# EAGLE board pcm2707_v1 (EAGLE 6.4)
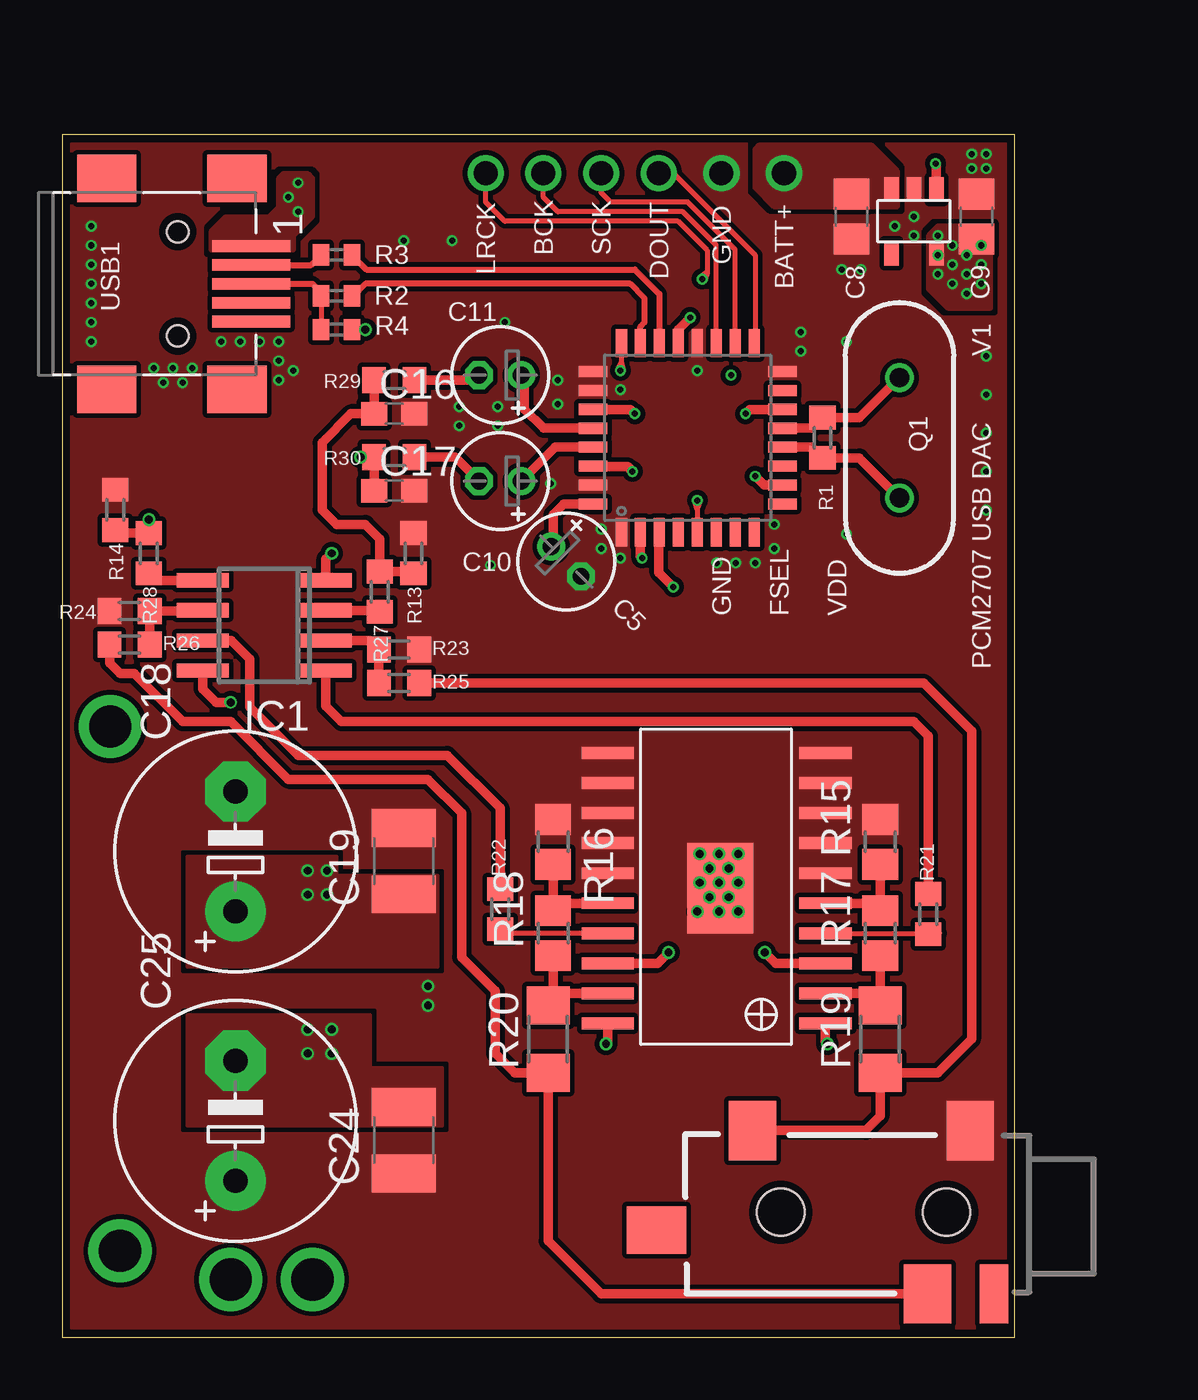
[diagram p0: board, top side]
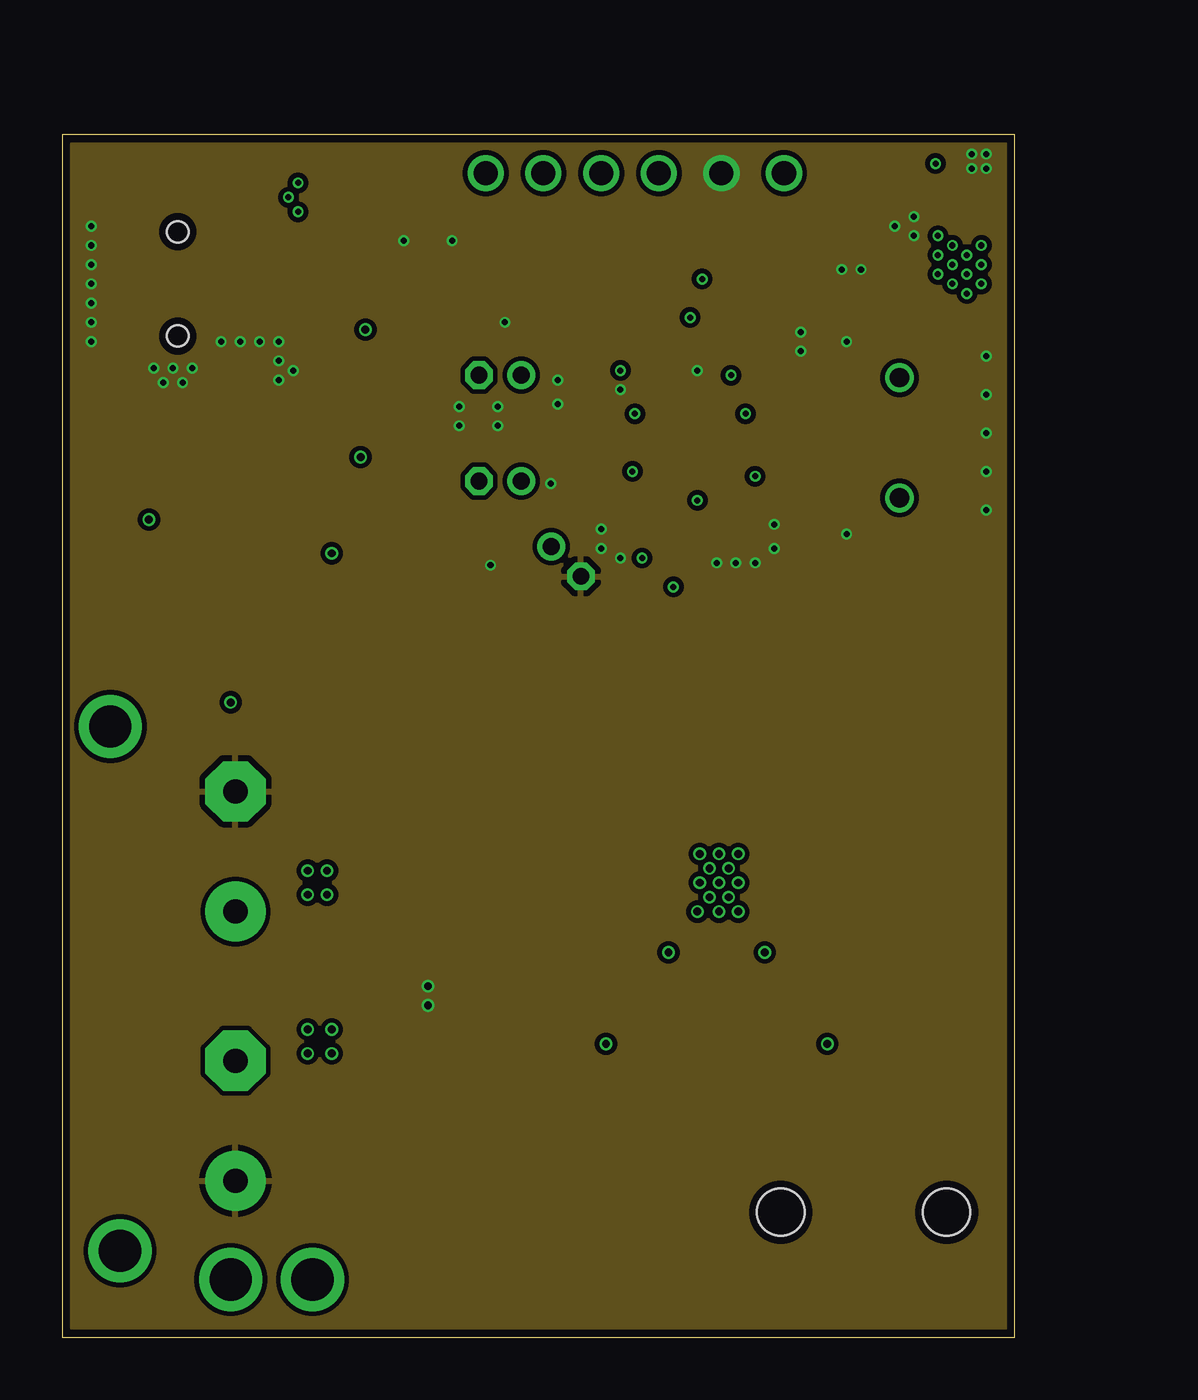
[diagram p1: board, inner layer Route2]
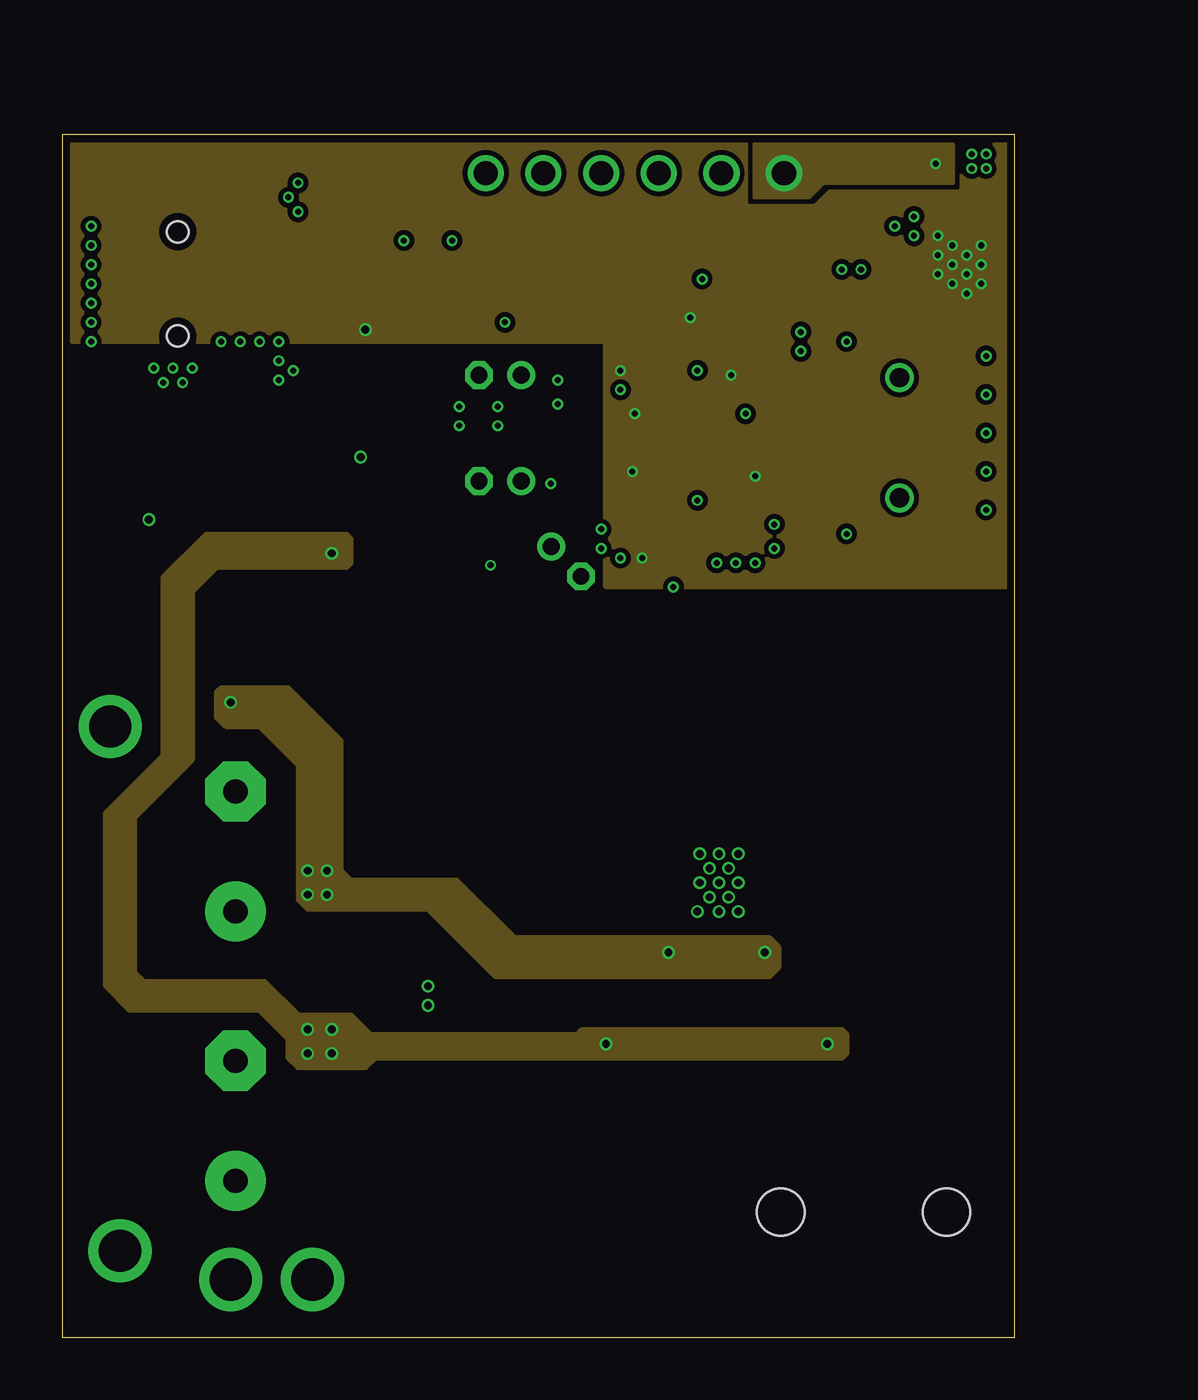
[diagram p2: board, inner layer Route3]
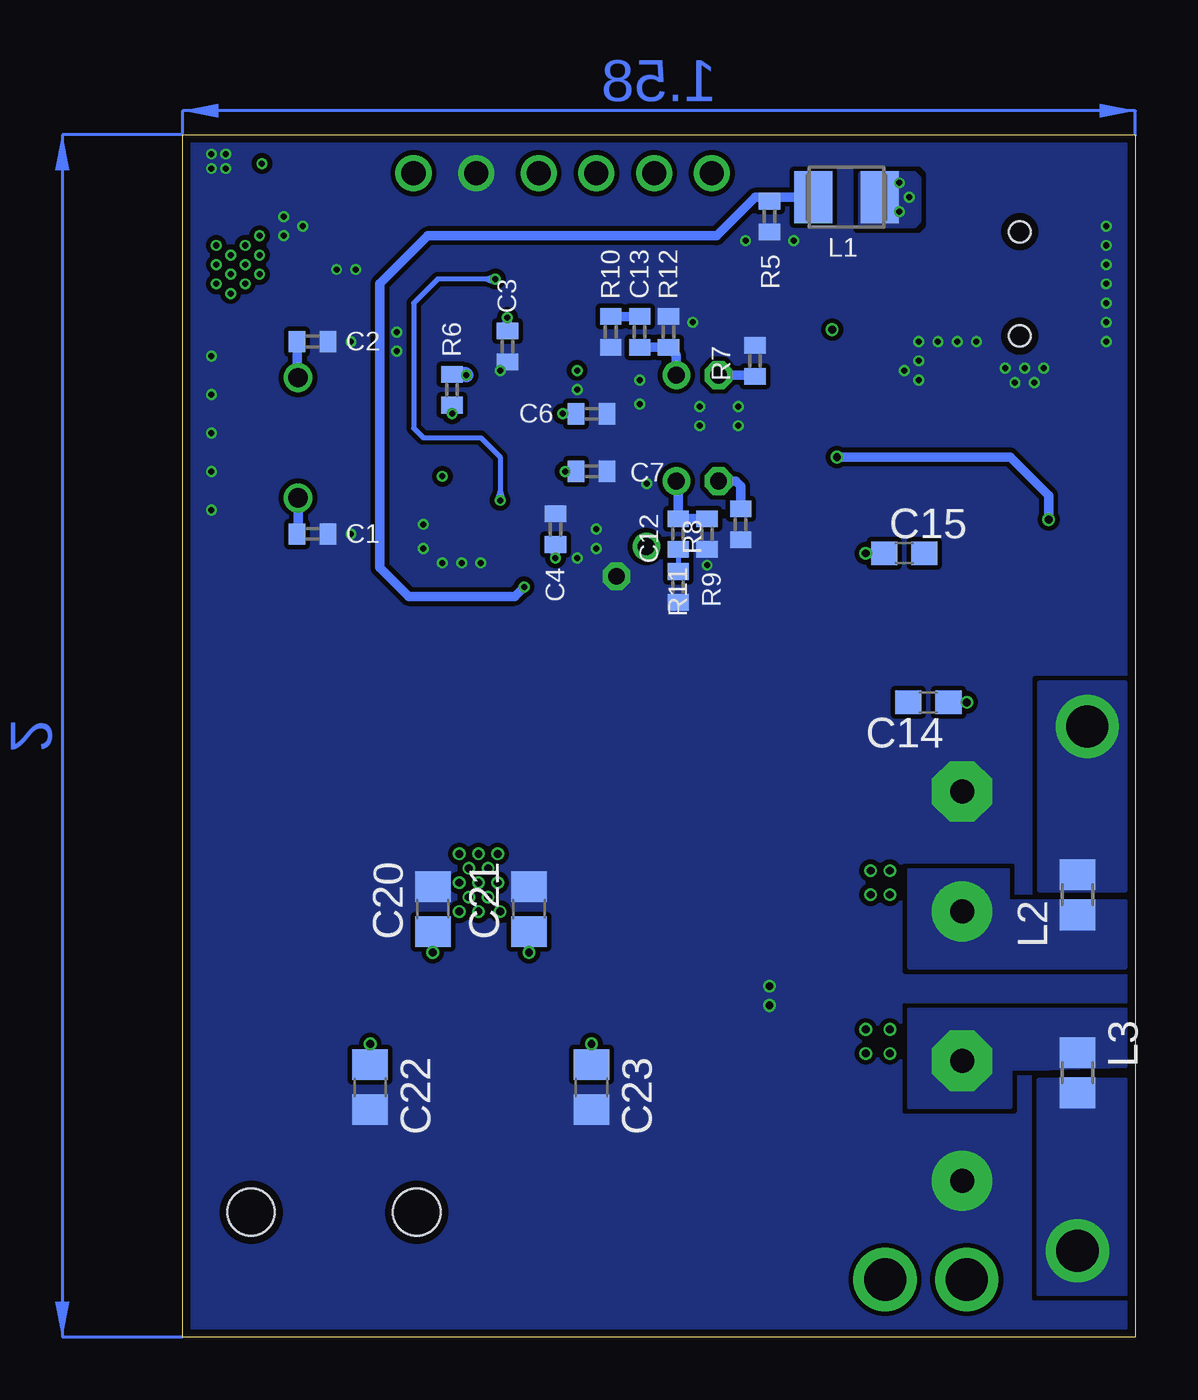
[diagram p3: board, bottom side, seen from below]

Size 40.23 x 50.8 mm. Coordinates in mm from the lower left corner, seen from the top.
Outline: 0,0 40.23,0 40.23,50.8 0,50.8 0,0
Copper layers (1*2*3*16): Top 0.035mm / dielectric 1.5mm / Route2 0.035mm / dielectric 0.15mm / Route3 0.035mm / dielectric 0.2mm / Bottom 0.035mm
Design rules "default *": minimum track width 5mil, minimum drill 10mil, track to track 8mil, track to pad 8mil, pad to pad 8mil, via to via 8mil, smd to smd 8mil, copper to edge 13mil, drill to drill 8mil, minimum pad ring 4mil, minimum via ring 4mil, stop-mask expansion 4mil, vias tented up to drill 14mil, thermal gap 10mil

## Footprints (pad centres in the part's own frame; a part is rotated, then mirrored left to right if it is on the bottom)
C0402 = smd 0.7 x 0.9: 1 -0.65,0; 2 0.65,0
E1,8-4 = drill 0.711 pad 1.168: + -0.889,0 | drill 0.711 pad 1.168 octagon: - 0.889,0
C0805 = smd 1.3 x 1.5: 1 -0.95,0; 2 0.95,0
C0603 = smd 1.1 x 1: 1 -0.85,0; 2 0.85,0
E5-10,5 = drill 1.016 pad 2.54: + -2.54,0 | drill 1.016 pad 2.54 octagon: - 2.54,0
C1210 = smd 1.6 x 2.7: 1 -1.4,0; 2 1.4,0
SO8 = smd 0.6 x 2.2: 1 -1.905,-2.6; 2 -0.635,-2.6; 3 0.635,-2.6; 4 1.905,-2.6; 5 1.905,2.6; 6 0.635,2.6; 7 -0.635,2.6; 8 -1.905,2.6
AUDIO-JACK-3.5MM-SMD = smd 2 x 2.5: RING 4.3,3.45; SLEEVE 2.5,-3.45; TIP 11.7,-3.45 | smd 1.2 x 2.5: RSH 1.5,3.45 | smd 2.5 x 2: TSH 15.75,0.75 | hole 2: 3.5,0; 10.5,0
L3225M = smd 1.6 x 2.2: 1 -1.4,0; 2 1.4,0
FB805 = smd 1.3 x 1.5: 1 -0.85,0; 2 0.85,0
SOT-23 = smd 0.6 x 1.05: 1 -0.95,-1.35; 2 0,-1.35; 3 0.95,-1.35; 4 0.95,1.35; 5 -0.95,1.35
HC49US = drill 0.813: 1 -2.54,0; 2 2.54,0
R0603 = smd 1 x 1.1: 1 -0.85,0; 2 0.85,0
R0402 = smd 0.7 x 0.9: 1 -0.65,0; 2 0.65,0
R0805 = smd 1.3 x 1.5: 1 -0.95,0; 2 0.95,0
R1206 = smd 1.6 x 1.803: 1 -1.422,0; 2 1.422,0
PCM2707 = smd 0.47 x 1.2: 1 -2.8,-4; 2 -2,-4; 3 -1.2,-4; 4 -0.4,-4; 5 0.4,-4; 6 1.2,-4; 7 2,-4; 8 2.8,-4; 17 2.8,4; 18 2,4; 19 1.2,4; 20 0.4,4; 21 -0.4,4; 22 -1.2,4; 23 -2,4; 24 -2.8,4 | smd 1.2 x 0.47: 9 4,-2.8; 10 4,-2; 11 4,-1.2; 12 4,-0.4; 13 4,0.4; 14 4,1.2; 15 4,2; 16 4,2.8; 25 -4,2.8; 26 -4,2; 27 -4,1.2; 28 -4,0.4; 29 -4,-0.4; 30 -4,-1.2; 31 -4,-2; 32 -4,-2.8
TPA6120_TPA6120 = smd 0.5 x 2.2: 1 0.25,1.095; 2 1.52,1.095; 3 2.79,1.095; 4 4.06,1.095; 5 5.33,1.095; 6 6.6,1.095; 7 7.87,1.095; 8 9.14,1.095; 9 10.41,1.095; 10 11.68,1.095; 11 11.68,10.295; 12 10.41,10.295; 13 9.14,10.295; 14 7.87,10.295; 15 6.6,10.295; 16 5.33,10.295; 17 4.06,10.295; 18 2.79,10.295; 19 1.52,10.295; 20 0.25,10.295 | smd 3.81 x 2.79: 21 5.965,5.54
CONN_USB_MINI-B = smd 2 x 2.5: BODY@1 -4.45,2.5; BODY@2 4.45,2.5; BODY@3 4.45,-3; BODY@4 -4.45,-3 | smd 0.5 x 3.3: D+ 0,3.1; D- -0.8,3.1; GND 1.6,3.1; ID 0.8,3.1; VUSB -1.6,3.1 | hole 0.9: -2.2,0; 2.2,0

## Placement (x,y rotation side)
C1  [C0402]  34.75,33.93 180 bottom
C2  [C0402]  34.75,42.06 180 bottom
C3  100n  [C0402]  26.52,41.86 270 bottom
C4  100n  [C0402]  24.49,34.14 90 bottom
C5  [E1,8-4]  21.28,32.77 315 top
C6  100n  [C0402]  22.96,39.01 0 bottom
C7  100n  [C0402]  22.96,36.58 0 bottom
C8  1u  [C0805]  33.32,47.35 270 top
C9  1u  [C0805]  38.61,47.35 90 top
C10  100u  [E1,8-4]  18.49,36.17 180 top
C11  100u  [E1,8-4]  18.49,40.64 180 top
C12  100n  [C0402]  19.3,33.93 270 bottom
C13  100n  [C0402]  20.93,42.47 90 bottom
C14  [C0603]  8.74,26.82 180 bottom
C15  100n  [C0603]  9.75,33.12 0 bottom
C16  100p  [C0603]  14.02,39.01 0 top
C17  100p  [C0603]  14.02,35.76 0 top
C18  100u  [E5-10,5]  7.32,20.52 90 top
C19  10u  [C1210]  14.43,20.12 90 top
C20  100n  [C0805]  29.67,18.08 90 bottom
C21  100n  [C0805]  25.6,18.08 90 bottom
C22  100n  [C0805]  32.31,10.57 270 bottom
C23  100n  [C0805]  22.96,10.57 270 bottom
C24  10u  [C1210]  14.43,8.33 90 top
C25  100u  [E5-10,5]  7.32,9.14 90 top
IC1  AD8620R  [SO8]  8.53,30.07 90 top
J2  AUDIO-JACK2SMD  [AUDIO-JACK-3.5MM-SMD]  40.84,5.28 180 top
L1  [L3225M]  12.19,48.16 180 bottom
L2  [FB805]  2.44,18.69 90 bottom
L3  [FB805]  2.44,11.18 270 bottom
LDO1  3.3V  [SOT-23]  35.97,47.14 180 top
Q1  [HC49US]  35.36,38 90 top
R1  1M  [R0603]  32.11,38 90 top
R2  22  [R0402]  11.58,43.99 180 top
R3  22  [R0402]  11.58,45.72 180 top
R4  22  [R0402]  11.58,42.57 0 top
R5  1M  [R0402]  15.44,47.35 270 bottom
R6  1M  [R0402]  28.85,40.03 90 bottom
R7  22  [R0402]  16.05,41.25 270 bottom
R8  22  [R0402]  16.66,34.34 90 bottom
R9  22  [R0402]  19.3,31.7 90 bottom
R10  22  [R0402]  22.15,42.47 90 bottom
R11  22  [R0402]  18.08,33.93 90 bottom
R12  22  [R0402]  19.71,42.47 270 bottom
R13  22K  [R0603]  14.83,33.12 270 top
R14  22K  [R0603]  2.24,34.95 270 top
R15  1K  [R0805]  34.54,20.93 90 top
R16  1K  [R0805]  20.73,20.93 270 top
R17  1K  [R0805]  34.54,17.07 90 top
R18  1K  [R0805]  20.73,17.07 90 top
R19  10  [R1206]  34.54,12.6 90 top
R20  10  [R1206]  20.52,12.6 90 top
R21  100  [R0603]  36.58,17.88 90 top
R22  100  [R0603]  18.49,18.08 90 top
R23  1K  [R0603]  14.22,29.06 0 top
R24  1K  [R0603]  2.84,30.68 180 top
R25  2K  [R0603]  14.22,27.64 0 top
R26  2K  [R0603]  2.84,29.26 0 top
R27  100  [R0603]  13.41,31.5 270 top
R28  100  [R0603]  3.66,33.12 270 top
R29  1K  [R0603]  14.02,40.44 180 top
R30  1K  [R0603]  14.02,37.19 180 top
U$1  PCM2707  [PCM2707]  26.42,38 0 top
U$2  TPA6120_TPA6120  [TPA6120_TPA6120]  33.32,13 90 top
USB1  CON-USB-F-MINI-B  [CONN_USB_MINI-B]  4.88,44.5 270 top

## Library data of the parts
C1-C25 L1 R1-R30 = rcl
IC1 = analog-devices; MF: ALTERA CORPORATION; MPN: AD8620ARZ; OC_FARNELL: 9994386; OC_NEWARK: 59K6972
J2 = SparkFun-Connectors; PROD_ID: CONN-10353
L2 L3 USB1 = dp_devices
LDO1 = ti_ldo
Q1 = SparkFun
U$1 = pcm2704c
U$2 = amp

## Nets
AMP_OUT_L: J2.TIP R19.1 R25.2
AMP_OUT_R: J2.RING R20.1 R26.1
BCK: U$1.19
D+: R2.1 U$1.23
D-: R3.1 U$1.22
DAC_OUT_L: C11.- R7.2 R29.1
DAC_OUT_R: C10.- R8.2 R30.1
DOUT: U$1.17
FSEL: U$1.9
GND: C1.1 C2.1 C3.2 C4.2 C5.- C6.2 C7.2 C8.2 C9.2 C16.2 C17.2 C18.- C19.2 C20.2 C21.2 C22.2 C23.2 C24.1 C25.+ J2.SLEEVE LDO1.2 R5.2 R7.1 R8.1 R9.1 R10.1 R11.1 R12.1 R13.1 R14.1 R15.2 R16.1 R23.2 R24.2 U$1.1 U$1.16 U$1.20 U$1.25 U$1.26 U$1.31 U$2.6 U$2.7 U$2.8 U$2.9 U$2.10 U$2.11 U$2.12 U$2.13 U$2.14 U$2.15 U$2.21
LRCK: U$1.5
N$1: C5.+ U$1.32
N$2: C10.+ C12.1 R11.2 U$1.29
N$3: C11.+ C13.1 R12.2 U$1.28
N$4: IC1.5 R28.2
N$5: IC1.3 R27.2
N$6: C12.2 R9.2
N$7: C13.2 R10.2
N$10: R6.1 U$1.14
N$11: IC1.1 R21.2
N$12: C16.1 R13.2 R27.1 R29.2
N$13: IC1.7 R22.2
N$14: C17.1 R14.2 R28.1 R30.2
N$17: IC1.2 R23.1 R25.1
N$18: IC1.6 R24.1 R26.2
N$21: R17.1 R19.2 U$2.2
N$22: R18.1 R20.2 U$2.19
N$25: R15.1 R17.2 U$2.5
N$26: R16.2 R18.2 U$2.16
N$27: R21.1 U$2.4
N$28: R22.1 U$2.17
SCK: U$1.18
USB_DN: R3.2 USB1.D-
USB_DP: R2.2 R4.1 USB1.D+
USB_VBUS: L1.1 USB1.VUSB
V+: C14.1 C18.+ C19.1 C20.1 C21.1 IC1.8 L2.1 U$2.3 U$2.18
V+_IN: L2.2
V-: C15.1 C22.1 C23.1 C24.2 C25.- IC1.4 L3.1 U$2.1 U$2.20
V-_IN: L3.2
VBUS: L1.2 R5.1 U$1.3
VDD: C3.1 C4.1 C6.1 C7.1 C9.1 LDO1.5 R4.2 R6.2 U$1.2 U$1.10 U$1.21 U$1.24 U$1.27 U$1.30
VIN: C8.1 LDO1.1 LDO1.3
XTI: C1.2 Q1.1 R1.1 U$1.12
XTO: C2.2 Q1.2 R1.2 U$1.13

## Tracks (layer width: path | path; a pad name or v marks a point on that pad's centre or on a via)
AMP_OUT_L
  Top 0.406: J2.TIP 28.74,8.74 33.93,8.74 34.54,9.35 R19.1 36.98,11.18 38.41,12.6 38.41,25.6 36.37,27.63 R25.2
AMP_OUT_R
  Top 0.406: J2.RING 36.13,1.83 22.76,1.83 20.52,4.06 R20.1 19.1,11.18 18.29,11.99 18.29,14.63 16.87,16.05 16.87,22.15 15.44,23.57 9.55,23.57 7.11,26.01 5.08,26.01 3.05,28.04 2.44,28.04 2,28.48 R26.1
BCK  (via drill 1.02)
  Top 0.203: U$1.19 27.62,46.15 26.21,47.55 20.93,47.55 20.32,48.16 v20.32,49.17
D+
  Top 0.254: R2.1 12.29,43.99 12.8,44.5 23.98,44.5 24.59,43.89 24.59,42.87 24.42,42.7 U$1.23
D-
  Top 0.254: R3.1 12.84,45.11 24.18,45.11 25.22,44.07 U$1.22
DAC_OUT_L
  Top 0.406: R29.1 17.4,40.44 C11.-
  Bottom 0.406: C11.- 16.1,40.64 R7.2
DAC_OUT_R
  Top 0.406: R30.1 16.59,37.19 C10.-
  Bottom 0.406: R8.2 16.66,35.97 16.87,36.17 C10.-
DOUT  (via drill 1.02)
  Top 0.203: U$1.17 29.26,42.04 29.26,45.72 25.81,49.17 v25.2,49.17
GND  (via drill 0.25, 0.33, 1.02)
  other vias: 27.84,49.17 35.15,46.94 35.97,47.35 35.97,46.53 38.4,49.99 39.01,49.99 38.4,49.38 39.01,49.38 9.14,42.06 9.14,41.25 9.14,40.44 9.75,40.84 1.22,46.94 1.22,46.13 1.22,45.31 1.22,44.5 1.22,43.69 1.22,42.88 1.22,42.06 16.46,46.33 14.43,46.33 22.76,34.14 23.57,32.92 30.07,34.34 29.26,32.72 30.07,33.32 20.93,40.44 18.69,42.88 20.93,39.42 8.33,42.06 7.52,42.06 6.71,42.06 3.86,40.94 4.67,40.94 5.49,40.94 20.62,36.07 26.82,40.84 27.64,32.72 28.45,32.72 32.92,45.11 33.73,45.11 33.12,42.06 33.12,33.93 31.19,42.47 31.19,41.66 39.01,34.95 39.01,36.58 39.01,38.2 39.01,39.83 39.01,41.45 16.76,39.32 18.39,39.32 16.76,38.51 18.39,38.51 5.08,40.34 4.27,40.34 22.76,33.32 23.57,40.03 18.08,32.61 15.44,14.83 15.44,14.02
  pour Top (rank 6, no thermals): 0.41,50.39 39.83,50.39 39.83,0.41 0.41,0.41
  pour Bottom (rank 6, no thermals): 0.41,50.39 39.83,50.39 39.83,0.41 0.41,0.41
  pour Route2: 0.41,50.39 39.83,50.39 39.83,0.41 0.41,0.41
LRCK  (via drill 0.25, 1.02)
  Top 0.203: 27.23,45.03 27.23,45.92 26.01,47.14 18.69,47.14 17.88,47.95 v17.88,49.17 | 27.23,45.03 27.23,44.91 v27.03,44.7 | v26.82,35.36 26.82,34.98 | 26.82,34.98 U$1.5 | 27.23,45.03 26.95,44.8 v27.03,44.7 | 27.23,45.03 27.15,44.68 v27.03,44.7 | 26.82,34.98 26.94,35.31 v26.82,35.36 | 26.82,34.98 26.7,35.31 v26.82,35.36
  Bottom 0.203: v27.03,44.7 27.41,44.7 | 27.41,44.7 29.46,44.7 30.48,43.69 30.48,38.4 30.07,38 27.64,38 26.82,37.19 26.82,35.74 | 26.82,35.74 v26.82,35.36 | 27.41,44.7 27.07,44.82 v27.03,44.7 | 27.41,44.7 27.07,44.58 v27.03,44.7 | 26.82,35.74 26.7,35.4 v26.82,35.36 | 26.82,35.74 26.94,35.4 v26.82,35.36
N$1
  Top 0.406: U$1.32 21.18,35.2 20.73,34.75 20.73,33.48 C5.+
N$2
  Top 0.406: U$1.29 20.81,37.6 C10.+
  Bottom 0.406: R11.2 C12.1 19.3,36.09 C10.+
N$3
  Top 0.406: U$1.28 20.33,38.4 19.51,39.22 19.51,40.52 C11.+
  Bottom 0.406: C11.+ 19.38,41.49 R12.2 C13.1
N$4
  Top 0.406: IC1.5 3.95,31.98 R28.2
N$5
  Top 0.406: IC1.3 13.35,30.71 R27.2
N$6
  Bottom 0.203: C12.2 R9.2
N$7
  Bottom 0.406: C13.2 R10.2
N$10  (via drill 0.25)
  Top 0.406: U$1.14 29.04,39.2 v28.85,39.01
  Bottom 0.406: R6.1 v28.85,39.01
N$11
  Top 0.406: R21.2 36.58,25.4 35.97,26.01 11.79,26.01 11.13,26.66 IC1.1
N$12
  Top 0.406: R13.2 14.76,32.35 R27.1 13.41,33.73 12.8,34.34 11.58,34.34 10.97,34.95 10.97,37.79 12.19,39.01 C16.1 R29.2
N$13
  Top 0.406: IC1.7 7.14,29.44 7.93,28.65 7.93,26.62 9.96,24.59 16.26,24.59 18.49,22.35 R22.2
N$14  (via drill 0.33)
  Top 0.406: R14.2 2.36,33.97 R28.1 v3.66,34.54 | C17.1 R30.2 v12.6,37.19
  Bottom 0.406: v3.66,34.54 3.66,35.56 5.28,37.19 v12.6,37.19
N$15  (via drill 0.33)
  other vias: 26.92,20.42
N$16  (via drill 0.33)
  other vias: 27.74,20.42
N$17
  Top 0.406: IC1.2 12.99,29.44 R23.1 R25.1
N$18
  Top 0.406: IC1.6 5.31,30.71 5.28,30.68 R24.1 R26.2
N$20  (via drill 1.78)
  other vias: 7.11,2.44
N$21
  Top 0.406: U$2.2 34.04,14.52 R19.2 R17.1
N$22
  Top 0.406: 20.32,13.41 R20.2 | U$2.19 21.03,14.52 R20.2 | R18.1 20.73,14.22 R20.2
N$23  (via drill 1.78)
  other vias: 10.57,2.44
N$25
  Top 0.406: U$2.5 34.23,18.33 R17.2 R15.1
N$26
  Top 0.406: U$2.16 21.04,18.33 R18.2 R16.2
N$27
  Top 0.203: U$2.4 37.05,17.07 R21.1
N$28
  Top 0.203: U$2.17 18.56,17.06 R22.1
N$31  (via drill 0.33)
  other vias: 28.55,20.42
N$32  (via drill 0.33)
  other vias: 27.33,19.81
N$33  (via drill 0.33)
  other vias: 28.14,19.81
N$34  (via drill 0.33)
  other vias: 26.92,19.2
N$35  (via drill 0.33)
  other vias: 27.74,19.2
N$36  (via drill 0.33)
  other vias: 28.55,19.2
N$37  (via drill 0.33)
  other vias: 27.33,18.59
N$38  (via drill 0.33)
  other vias: 28.14,18.59
N$39  (via drill 0.33)
  other vias: 26.82,17.98
N$40  (via drill 0.33)
  other vias: 27.74,17.98
N$41  (via drill 0.33)
  other vias: 28.55,17.98
SCK  (via drill 1.02)
  Top 0.203: U$1.18 28.42,45.95 26.42,47.95 23.17,47.95 22.76,48.36 v22.76,49.17
USB_DN
  Top 0.254: R3.2 10.51,45.3 USB1.D-
USB_DP
  Top 0.203: R2.2 R4.1
  Top 0.254: USB1.D+ 10.57,44.5 10.93,44.13 R2.2
USB_VBUS  (via drill 0.25)
  other vias: 9.96,47.55 9.96,48.77 9.55,48.16
  pour Top (no thermals): 6.3,45.92 6.3,46.74 6.91,47.35 8.74,47.35 9.14,47.75 9.14,48.97 9.35,49.17 10.36,49.17 10.57,48.97 10.57,47.35 9.75,46.53 9.75,45.92
  pour Bottom (no thermals): 11.58,49.17 9.35,49.17 9.14,48.97 9.14,47.14 9.35,46.94 11.58,46.94
V+  (via drill 0.33)
  Top 0.406: U$2.3 30.13,15.79 v29.67,16.26 | U$2.18 25.14,15.79 v25.6,16.26 | IC1.8 5.93,27.39 6.5,26.82 v7.11,26.82
  Bottom 0.406: C21.1 v25.6,16.26 | C20.1 v29.67,16.26 | C14.1 v7.11,26.82
  other vias: 10.36,19.71 11.18,19.71 10.36,18.69 11.18,18.69
  pour Bottom (no thermals): 0.41,18.39 5.38,18.39 5.38,19.71 9.55,19.71 9.55,15.65 0.41,15.65
  pour Top (rank 5, no thermals): 5.28,15.65 15.85,15.65 15.85,19.51 11.58,19.51 11.58,20.32 5.28,20.32
  pour Route3 (no thermals): 6.5,27.23 6.5,26.21 6.91,25.81 8.33,25.81 9.96,24.18 9.96,18.49 10.36,18.08 15.44,18.08 18.29,15.24 29.87,15.24 30.28,15.65 30.28,16.46 29.87,16.87 19.1,16.87 16.66,19.3 12.19,19.3 11.79,19.71 11.79,25.2 9.55,27.43 6.71,27.43
V+_IN  (via drill 1.78)
  other vias: 2.03,25.81
  pour Bottom (no thermals): 0.41,27.64 4.06,27.64 4.06,18.9 0.41,18.9
V-  (via drill 0.33)
  Top 0.406: U$2.1 32.23,12.47 v32.31,12.39 | U$2.20 23.03,12.46 v22.96,12.39 | IC1.4 11.13,32.88 v11.38,33.12
  Bottom 0.406: C23.1 v22.96,12.39 | C22.1 v32.31,12.39 | C15.1 v11.38,33.12
  other vias: 10.36,11.99 11.38,11.99 10.36,13 11.38,13
  pour Bottom (no thermals): 0.41,11.48 0.41,13.82 9.55,13.82 9.55,9.75 5.28,9.75 5.28,11.38 3.66,11.38
  pour Top (rank 5, no thermals): 5.28,13.61 5.28,8.94 16.05,8.94 16.05,11.38 13,11.38 13,13.61
  pour Route3 (no thermals): 32.92,11.79 13.21,11.79 12.8,11.38 9.96,11.38 9.55,11.79 9.55,12.6 8.33,13.82 2.84,13.82 1.83,14.83 1.83,22.15 4.27,24.59 4.27,32.11 6.1,33.93 11.99,33.93 12.19,33.73 12.19,32.72 11.99,32.51 6.5,32.51 5.49,31.5 5.49,24.38 3.05,21.95 3.05,15.44 3.45,15.04 8.53,15.04 9.96,13.61 12.19,13.61 13,12.8 21.74,12.8 21.95,13 32.92,13 33.12,12.8 33.12,11.99
V-_IN  (via drill 1.78)
  other vias: 2.44,3.66
  pour Bottom (no thermals): 4.06,10.87 0.41,10.87 0.41,1.83 4.06,1.83
VBUS  (via drill 0.25)
  Top 0.406: v25.81,31.7 25.2,32.31 25.2,33.98 U$1.3
  Bottom 0.406: v25.81,31.7 26.21,31.29 30.68,31.29 31.9,32.51 31.9,44.5 29.87,46.53 17.68,46.53 16.05,48.16 L1.2 15.28,48.16 R5.1
VDD  (via drill 0.25, 0.33)
  Top 0.203: U$1.24 23.62,41.22 | 23.62,41.22 23.62,40.89 v23.57,40.84 | 23.62,41.22 23.46,40.9 v23.57,40.84 | 23.62,41.22 23.69,40.87 v23.57,40.84
  Top 0.406: U$1.2 24.42,32.99 v24.49,32.92 | U$1.21 26.02,42.58 v26.52,43.08 | U$1.27 24,39.2 v24.18,39.01 | U$1.30 22.4,36.78 23.88,36.78 v24.08,36.58 | U$1.10 29.64,36 v29.26,36.37 | R4.2 v12.8,42.57
  Bottom 0.406: C4.1 v24.49,32.92 | C3.1 v26.52,43.08 | C6.1 v24.18,39.01 | C7.1 v24.08,36.58
  Bottom 0.61: R6.2 28.29,40.68 v28.25,40.64
  other vias: 36.98,44.91 37.59,45.31 37.59,44.5 37.59,46.13 36.98,46.53 36.98,45.72 38.2,45.72 38.2,44.91 38.2,44.09 38.81,45.31 38.81,44.5 38.81,46.13
  pour Top (no thermals): 39.22,46.94 36.98,46.94 36.58,46.53 36.58,44.3 37.39,43.48 39.22,43.48
  pour Route3 (rank 6, no thermals): 0.41,50.39 39.83,50.39 39.83,31.7 22.96,31.7 22.96,42.06 0.41,42.06
VIN  (via drill 0.25, 1.02)
  Top 0.406: LDO1.1 36.92,49.54 v36.88,49.58
  other vias: 30.48,49.17
  pour Top (no thermals): 29.46,50.39 34.14,50.39 35.26,49.28 35.26,47.75 30.07,47.75 29.26,48.56 29.26,50.19
  pour Route3 (no thermals): 29.26,50.39 37.59,50.39 37.59,48.77 32.11,48.77 31.5,48.16 29.26,48.16
XTI
  Top 0.406: U$1.12 31.66,37.6 R1.1 33.67,37.15 Q1.1
  Bottom 0.406: Q1.1 35.36,33.97 C1.2
XTO
  Top 0.406: U$1.13 31.66,38.4 R1.2 33.67,38.85 Q1.2
  Bottom 0.406: C2.2 35.4,40.58 Q1.2
(copper drawn outside any net)
  shapes: Bottom area x2

## Text on the board
tPlace: BCK | SCK | GND | LRCK | DOUT | BATT+ | V1 | GND | FSEL | VDD | PCM2707 USB DAC